# Altium PCB PCB2.PcbDoc
Units mm, origin at the board's own origin, x right, y up, seen from the top; angles counter-clockwise.
Board outline 91.95 x 88.52 mm, 2 copper layers (Top Layer, Bottom Layer); 12 components, 25 nets, 78 pads, 0 vias.
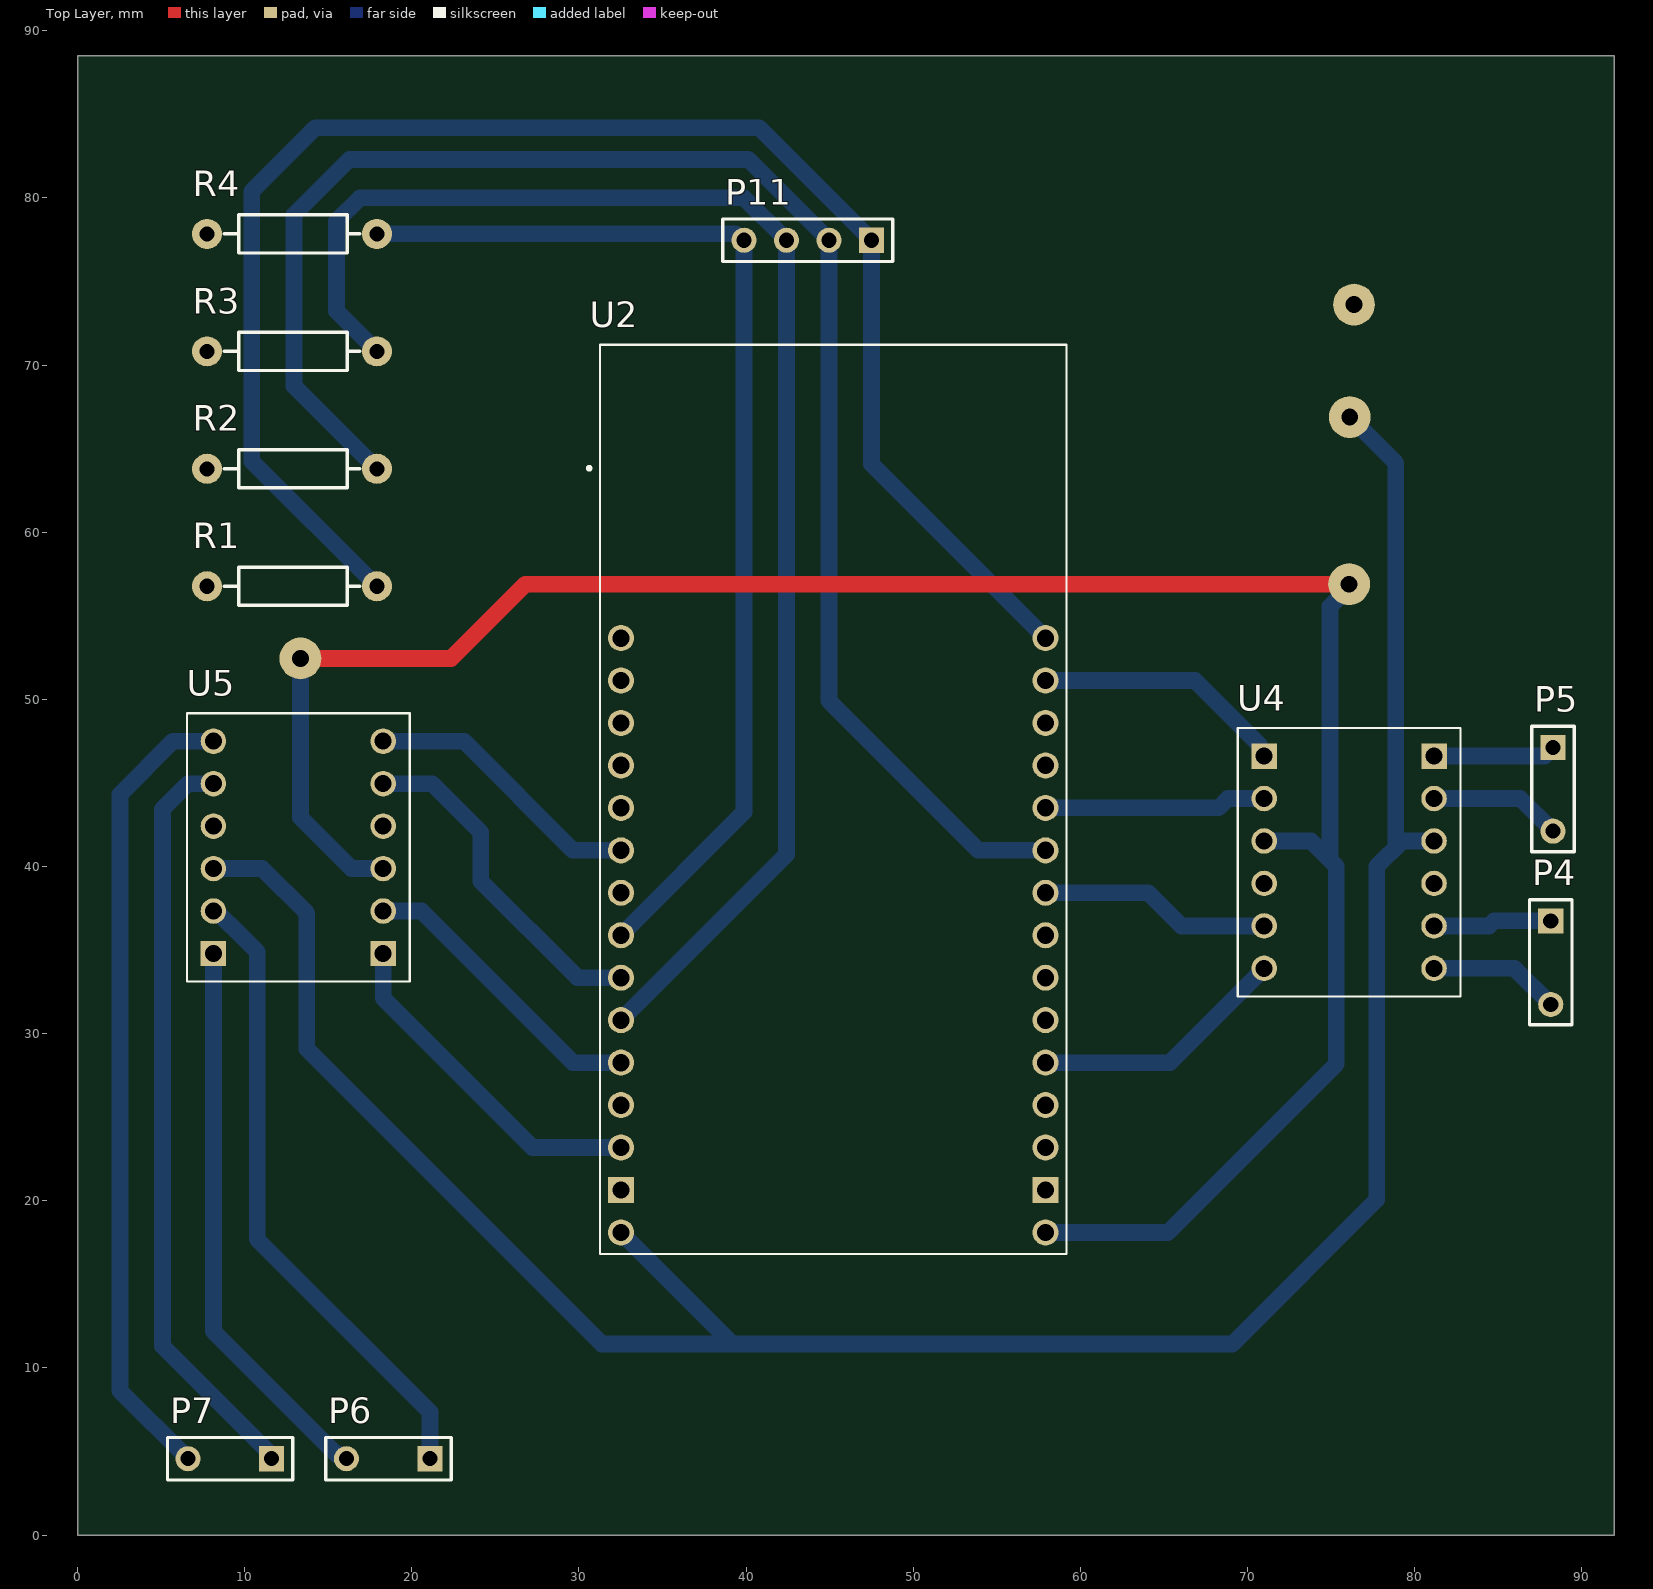
[diagram p0: Top Layer view]
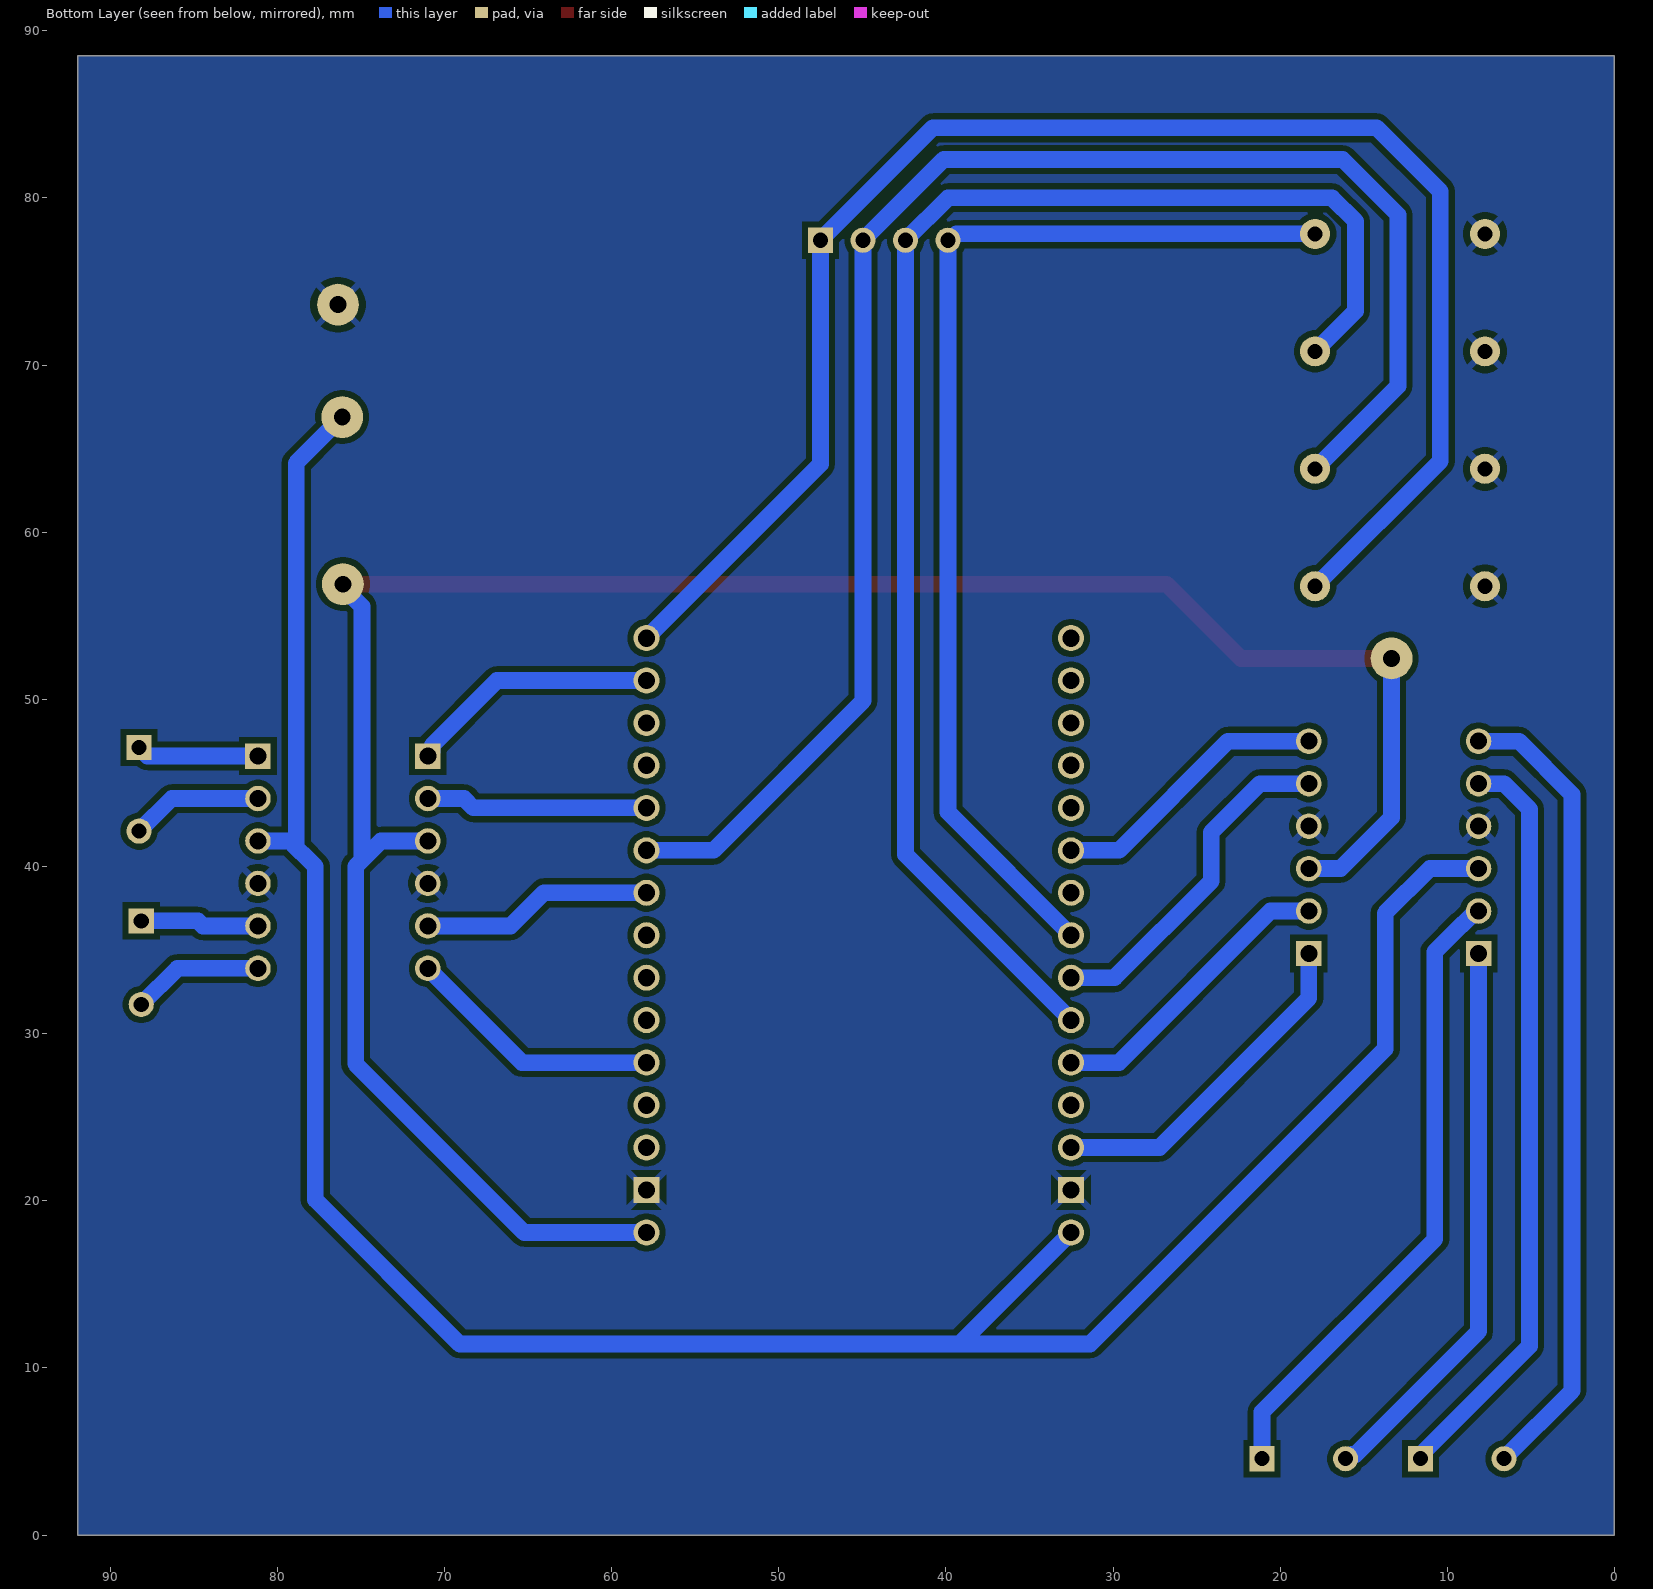
[diagram p1: Bottom Layer view, seen from below]
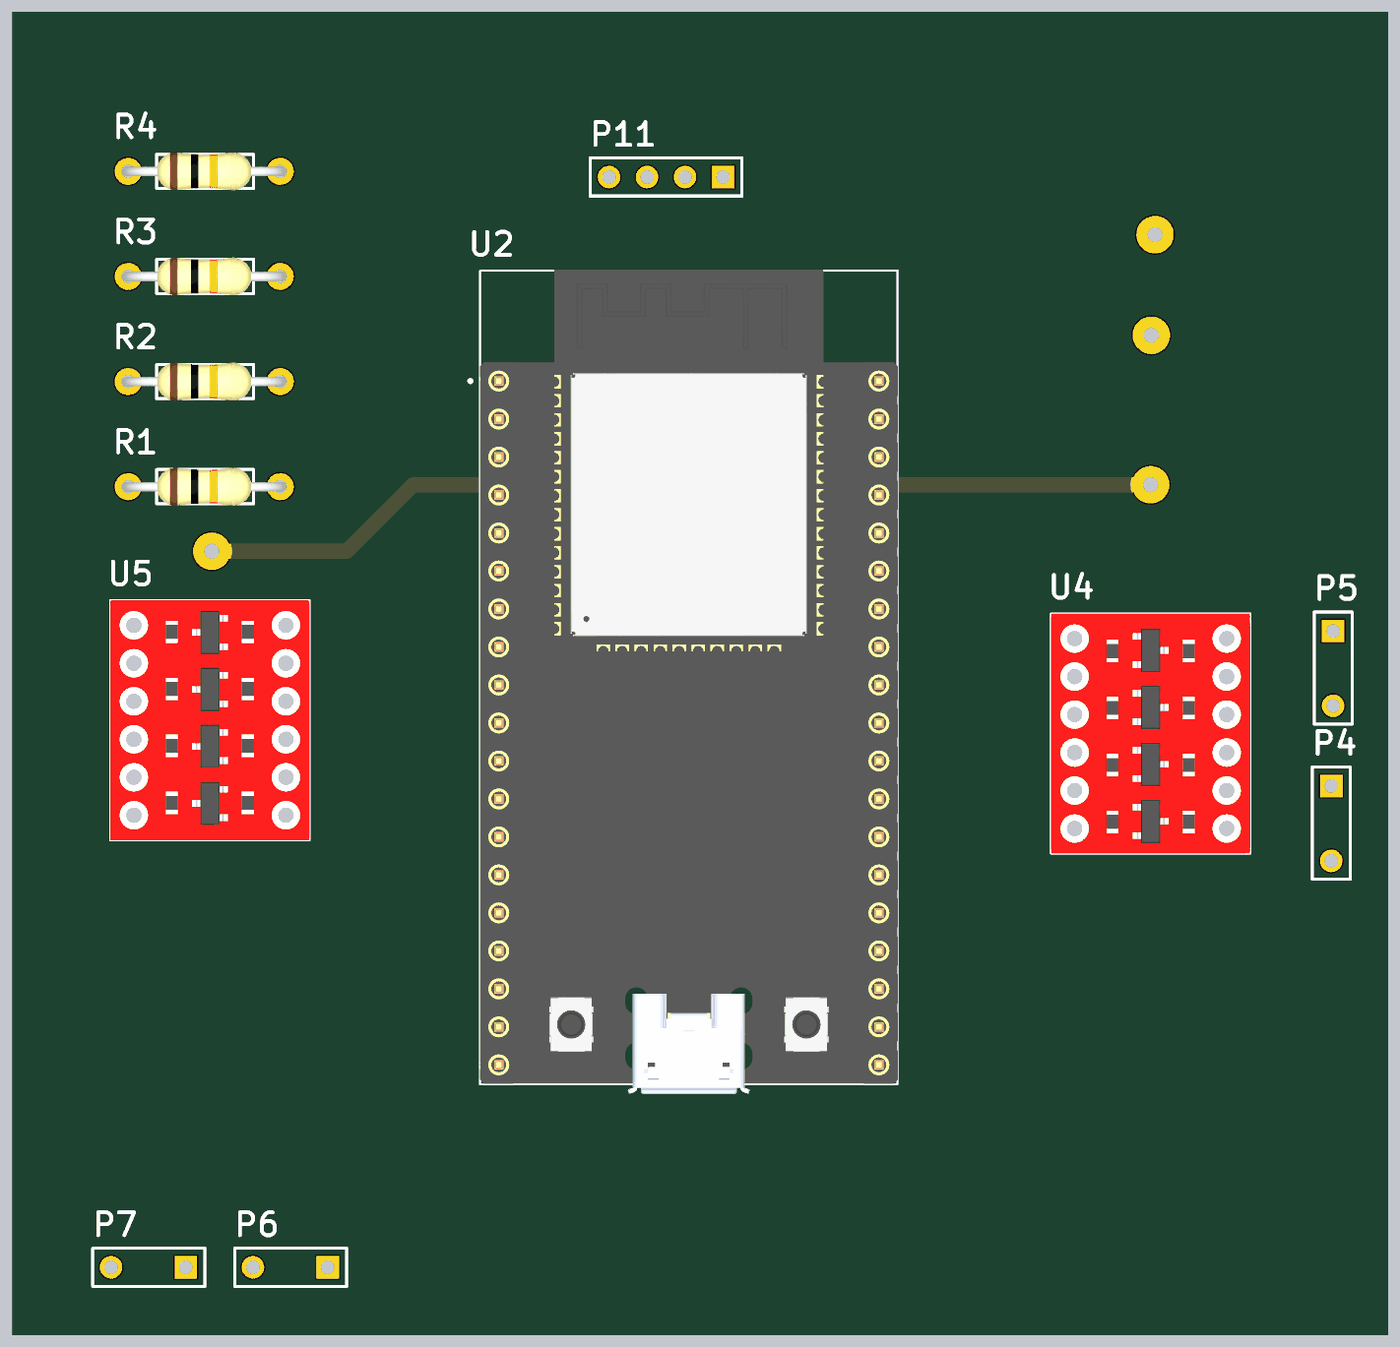
[diagram p2: 3D render of the assembled board from above, using the file's embedded part models]

## Layer stack, top to bottom
Top Solder: solder mask 0.0102, Solder Resist, Dk 3.5
Top Layer: signal copper 0.0356
Dielectric 1: dielectric 0.32, FR-4, Dk 4.8
Bottom Layer: signal copper 0.0356
Bottom Solder: solder mask 0.0102, Solder Resist, Dk 3.5

## Board outline
0,0 91.948,0 91.948,88.519 0,88.519

## Design rules (kind name [scope] priority, off if disabled: settings)
Clearance [All] p1: gap=0.35 ignorepadtopadclearanceinfootprint=FALSE except(0: Arc-Text Arc-Hole Track-Text Track-Hole SMDPad-Text SMDPad-Hole THPad-Text THPad-Hole Via-Text Via-Hole Fill-Text Fill-Hole Poly-Text Poly-Hole Region-Text Region-Hole Text-Text Text-Hole; 0.7: Arc-Arc Arc-Track Track-Track)
ComponentClearance [All] p1: gap=0.3 collisioncheckmode=3 verticalgap=0.254 showdistances=FALSE
HoleSize HoleSize_1 [All] p1: absolutevalues=TRUE maxlimit=1 minlimit=0.6 maxpercent=80.000 minpercent=20.000
HoleToHoleClearance [All] p1: gap=0.1 allowstackedmicrovias=TRUE
MinimumSolderMaskSliver [All] p1: minsoldermaskwidth=0.05
PolygonConnect [All] p1: connectstyle=Relief reliefconductorwidth=0.4 reliefentries=4 polygonreliefangle="90 Angle" airgapwidth=0.4
RoutingVias [All] p1: holewidth=0.9 width=2 viastyle="Through Hole" minholewidth=0.9 minwidth=2 maxholewidth=0.9 maxwidth=2
SilkToSilkClearance [All] p1: silktosilkclearance=0
SilkToSolderMaskClearance [IsPad] p1: minsilkscreentomaskgap=0 clearancetoexposedcopper=TRUE
SolderMaskExpansion [All] p1: expansion=0.102 istentingtop=FALSE
SupplyNets "Schematic Supply Nets_3" [InNet('VCC')] p1: voltage=0.000
SupplyNets "Schematic Supply Nets_2" [InNet('GND')] p2: voltage=0.000
SupplyNets "Schematic Supply Nets_1" [InNet('+3.3V')] p3: voltage=0.000
SupplyNets "Schematic Supply Nets" [InNet('+5V')] p4: voltage=0.000
Width [All] p1: maxlimit=1.2 minlimit=0.5 preferedwidth=1 minimp=50.000000 maximp=50.000000 favimp=50.000000
24 further rules are at their usual default settings.

## Components (designator, comment, footprint, x,y, rotation, side; value= is the part's Value field where it differs from the comment)
P4 "Header 1x2" KRE1X2 88.138,36.75 r270 top
P5 "Header 1x2" KRE1X2 88.265,47.117 r270 top
P6 "Header 1x2" KRE1X2 21.082,4.572 r180 top
P7 "Header 1x2" KRE1X2 11.604,4.572 r180 top
P11 "Header 1x4" HDR1X4 47.498,77.47 r180 top
R1 "4x10K" "RES 10K 1/4W CARBON FILM" 12.827,56.769 r0 top
R2 "RES 10K 1/4W CARBON FILM" "RES 10K 1/4W CARBON FILM" 12.827,63.796 r0 top
R3 "RES 10K 1/4W CARBON FILM" "RES 10K 1/4W CARBON FILM" 12.827,70.824 r0 top
R4 "RES 10K 1/4W CARBON FILM" "RES 10K 1/4W CARBON FILM" 12.827,77.851 r0 top
U2 "ESP32-DEVKITC-32D" "MODULE_ESP32-DEVKITC-32D - duplicate" 45.212,44.069 r0 top
U4 "Logic Level Shifter" CONV_BOB-12009 76.073,40.259 r0 top
U5 "Logic Level Shifter" CONV_BOB-12009 13.208,41.148 r180 top

## Footprints (in the part's own frame and the unit in brackets; to place one, negate y for a bottom-side part, rotate by r counter-clockwise, add the part's x,y. Pads: shape width x height; smd on the part's side, far side on the other; paste and mask are expansions set on the pad)
CONV_BOB-12009 [mil]
  round 60 hole 40: GND_1(200,-50) GND_2(-200,-50) HV(200,50) HV2(200,150) HV3(200,-150) HV4(200,-250) LV(-200,50) LV2(-200,150) LV3(-200,-150) LV4(-200,-250)
  rect 60x60 / inner round 60 / far side rect 60x60 hole 40: HV1(200,250) LV1(-200,250)
  silkscreen extent -262,-316 262,316, body extent -262,-316 262,316, height 110
HDR1X4 [mm]
  rect 1.5x1.5 hole 0.9: 1(0,0)
  round 1.5 hole 0.9: 2(2.54,0) 3(5.08,0) 4(7.62,0)
  silkscreen extent -1.27,-1.27 8.89,1.27
KRE1X2 [mm]
  rect 1.5x1.5 hole 0.9: 1(0,0)
  round 1.5 hole 0.9: 2(5,0)
  silkscreen extent -1.27,-1.27 6.22,1.27
"MODULE_ESP32-DEVKITC-32D - duplicate" [mm]
  round 1.56 hole 1.04: J2-5(-12.7,9.6) J2-6(-12.7,7.06) J2-7(-12.7,4.52) J2-8(-12.7,1.98) J2-9(-12.7,-0.56) J2-10(-12.7,-3.1) J2-11(-12.7,-5.64) J2-12(-12.7,-8.18) J2-13(-12.7,-10.72) J2-14(-12.7,-13.26) J2-15(-12.7,-15.8) J2-16(-12.7,-18.34) J2-17(-12.7,-20.88) J2-19(-12.7,-25.96) J3-5(12.7,9.6) J3-6(12.7,7.06) J3-7(12.7,4.52) J3-8(12.7,1.98) J3-9(12.7,-0.56) J3-10(12.7,-3.1) J3-11(12.7,-5.64) J3-12(12.7,-8.18) J3-13(12.7,-10.72) J3-14(12.7,-13.26) J3-15(12.7,-15.8) J3-16(12.7,-18.34) J3-17(12.7,-20.88) J3-19(12.7,-25.96)
  rect 1.56x1.56 hole 1.04: J2-18(-12.7,-23.42) J3-18(12.7,-23.42)
  silkscreen extent -14.7,-27.25 13.95,27.15, body extent -13.97,-27.9 13.97,27.2, height 6.69
"RES 10K 1/4W CARBON FILM" [mm]
  round 1.8 hole 0.9: 1(-5.08,0) 2(5.08,0)
  silkscreen extent -4.06,-1.14 4.06,1.14, body extent -5.47,-1.27 5.47,1.27, height 3.27

## Part data
P4 P5 P6 P7: Manufacturer=Cromax, Manufacturer Part Number=IMP10327, Supplier Part Number 1="Barra de Pinos Simples 1x40 Macho BMO40-1E", Accessory Type=-, Brand=Cromax, Category="Headers & Wire Housings", ComponentLink1Description=http://loja.multcomercial.com.br/barra-de-pinos-simples-1x40-macho-bmo40-1e.html, ComponentLink1URL=http://loja.multcomercial.com.br/barra-de-pinos-simples-1x40-macho-bmo40-1e.html, Contact Gender="Pin (Male)", Contact Plating=Gold, Contact Type=-, Minimum Order Quantity=1, Mounting Angle=Vertical, Mounting Style="Straight Pin", Number of Positions="40 Position", Number of Rows="1 Row", Pitch="2 mm", Pricing 1="1=1.00, 5=0.20 (BRL)", Product=Headers, Product Category=Accessories, Reeling=False, RoHS="RoHS Compliant", RoHS - Mouser=Y, Row Spacing=-, Stock 1=14, Supplier 1="Mult Comercial", Termination Style="Through Hole", Type=Breakaway
P11: "Headers & Wire Housings 40Pin 2mm Spacing Single Row Hdrs, 5pc", Manufacturer=Cromax, Manufacturer Part Number=IMP10327, Supplier Part Number 1="Barra de Pinos Simples 1x40 Macho BMO40-1E", Accessory Type=-, Brand=Cromax, Category="Headers & Wire Housings", ComponentLink1Description=http://loja.multcomercial.com.br/barra-de-pinos-simples-1x40-macho-bmo40-1e.html, ComponentLink1URL=http://loja.multcomercial.com.br/barra-de-pinos-simples-1x40-macho-bmo40-1e.html, Contact Gender="Pin (Male)", Contact Plating=Gold, Contact Type=-, Minimum Order Quantity=1, Mounting Angle=Vertical, Mounting Style="Straight Pin", Number of Positions="40 Position", Number of Rows="1 Row", Pitch="2 mm", Pricing 1="1=1.00, 5=0.20 (BRL)", Product=Headers, Product Category=Accessories, Reeling=False, RoHS="RoHS Compliant", RoHS - Mouser=Y, Row Spacing=-, Stock 1=14, Supplier 1="Mult Comercial", Termination Style="Through Hole", Type=Breakaway
R1: library part "RES 10K 1/4W CARBON FILM", "RES 10K OHM 1/4W 5% CARBON FILM", Manufacturer=Ty-Ohm, Manufacturer Part Number=CR25, Operating Temperature="-55°C ~ 155°C", Package / Case=Axial, Power (Watts)="0.25W, 1/4W", Resistance (Ohms)=?, Supplier Part Number 1="Resistor de Filme de Carbono 1/4 de Watt CR25 5% de tolerância - 0.22R Ω à 10M Ω", Temperature Coefficient="0/ -500ppm/°C", Tolerance=±5%, Category=Resistors, ComponentLink1Description=http://loja.multcomercial.com.br/resistor-de-1-4-de-watt-cr25-5-de-tolerancia.html, ComponentLink1URL=http://loja.multcomercial.com.br/resistor-de-1-4-de-watt-cr25-5-de-tolerancia.html, Composition="Carbon Film", Features="Flame Retardant Coating, Safety", Height=-, Number of Terminations=2, Packaging="Cut Tape (CT)", Pricing 1="1=0.20 (BRL)", RoHS="RoHS Compliant", Size / Dimension="0.091\" Dia x 0.256\" L (2.30mm x 6.50mm)", Stock 1=617543, Supplier 1="Mult Comercial", Supplier Device Package=Axial
R2 R3 R4: "RES 10K OHM 1/4W 5% CARBON FILM", Manufacturer=Ty-Ohm, Manufacturer Part Number=CR25, Operating Temperature="-55°C ~ 155°C", Package / Case=Axial, Power (Watts)="0.25W, 1/4W", Resistance (Ohms)=?, Supplier Part Number 1="Resistor de Filme de Carbono 1/4 de Watt CR25 5% de tolerância - 0.22R Ω à 10M Ω", Temperature Coefficient="0/ -500ppm/°C", Tolerance=±5%, Category=Resistors, ComponentLink1Description=http://loja.multcomercial.com.br/resistor-de-1-4-de-watt-cr25-5-de-tolerancia.html, ComponentLink1URL=http://loja.multcomercial.com.br/resistor-de-1-4-de-watt-cr25-5-de-tolerancia.html, Composition="Carbon Film", Features="Flame Retardant Coating, Safety", Height=-, Number of Terminations=2, Packaging="Cut Tape (CT)", Pricing 1="1=0.20 (BRL)", RoHS="RoHS Compliant", Size / Dimension="0.091\" Dia x 0.256\" L (2.30mm x 6.50mm)", Stock 1=617543, Supplier 1="Mult Comercial", Supplier Device Package=Axial
U2: "WiFi Development Tools (802.11) ESP32 General Development Kit, ESP32-WROOM-32D on the board", Package=None, Check_prices=https://www.snapeda.com/parts/ESP32-DEVKITC-32D/Espressif+Systems/view-part/?ref=eda, MF="Espressif Systems", MP=ESP32-DEVKITC-32D, SnapEDA_Link=https://www.snapeda.com/parts/ESP32-DEVKITC-32D/Espressif+Systems/view-part/?ref=snap
U4 U5: "BSS138 - Logic-Level Translator Interface Evaluation Board", Package=None, Check_prices=https://www.snapeda.com/parts/BOB-12009/SparkFun/view-part/?ref=eda, MF=SparkFun, MP=BOB-12009, SnapEDA_Link=https://www.snapeda.com/parts/BOB-12009/SparkFun/view-part/?ref=snap

## Free pads (board coordinates)
  round 2.5 hole 1: 2(13.335,52.451) 2(76.073,56.896) 2(76.114,66.889) 2(76.368,73.62)

## Nets (pads, with @x,y where several pads share a name; then routed paths per layer and width w, separated by ;. In a path a pad name is that pad's centre, name@x,y a point inside that pad or via, vN(x,y) a via of type N, cw(c..) or ccw(c..) an arc to the next point about the centre after c; other vN are vias at no path point)
+3.3V: pad.2@13.335,52.451 pad.2@76.073,56.896 U2.J3-19 U4.LV U5.LV | length 135.6
  Top Layer w1: pad.2@13.335,52.451 22.352,52.451 26.797,56.896 pad.2@76.073,56.896
  Bottom Layer w1: pad.2@13.335,52.451 13.335,42.926 16.383,39.878 U5.LV ; U2.J3-19 65.226,18.109 75.311,28.194 75.311,40.005 74.93,40.386 ; U4.LV 73.787,41.529 74.93,40.386 ; pad.2@76.073,56.896 76.073,56.703 74.93,55.56 74.93,40.386
+5V: pad.2@76.114,66.889 U2.J2-19 U4.HV U5.HV | length 150
  Bottom Layer w1: U5.HV 11.049,39.878 13.716,37.211 13.716,29.083 31.369,11.43 39.191,11.43 ; U2.J2-19 39.191,11.43 ; pad.2@76.114,66.889 78.867,64.135 78.867,41.529 78.867,41.148 ; U4.HV 79.248,41.529 78.867,41.148 ; 39.191,11.43 69.088,11.43 77.724,20.066 77.724,40.005 78.173,40.454 78.867,41.148
D1_B: P6.2 U5.HV1 | length 33.7
  Bottom Layer w1: U5.HV1 8.128,12.192 15.498,4.822 15.697,4.822 15.947,4.572 P6.2
D1_Backward: U2.J2-15 U5.LV2 | length 18
  Bottom Layer w1: U5.LV2 20.574,37.338 29.643,28.269 U2.J2-15
D1_F: P6.1 U5.HV2 | length 38.2
  Bottom Layer w1: U5.HV2 8.27,37.338 9.077,36.531 9.121,36.531 10.746,34.906 10.746,17.702 21.082,7.366 P6.1
D1_Forward: U2.J2-17 U5.LV1 | length 20.6
  Bottom Layer w1: U5.LV1 18.288,32.122 27.221,23.189 U2.J2-17
D2_B: P7.2 U5.HV4 | length 48.3
  Bottom Layer w1: P7.2 2.54,8.636 2.54,44.323 5.715,47.498 U5.HV4
D2_Backward: U2.J2-10 U5.LV4 | length 16.9
  Bottom Layer w1: U5.LV4 23.114,47.498 29.643,40.969 U2.J2-10
D2_F: P7.1 U5.HV3 | length 45.2
  Bottom Layer w1: U5.HV3 6.604,44.958 5.08,43.434 5.08,11.303 11.354,5.029 11.354,4.822 P7.1
D2_Forward: U2.J2-13 U5.LV3 | length 20.7
  Bottom Layer w1: U5.LV3 21.209,44.958 24.13,42.037 24.13,39.116 29.897,33.349 U2.J2-13
GND: pad.2@76.368,73.62 R1.1 R2.1 R3.1 R4.1 U2.J2-18 U2.J3-18 U4.GND_1 U4.GND_2 U5.GND_1 U5.GND_2
LB: P4.2 U4.HV4 | length 7.9
  Bottom Layer w1: U4.HV4 85.979,33.909 P4.2
Left_Backward: U2.J3-11 U4.LV3 | length 13.9
  Bottom Layer w1: U2.J3-11 64.06,38.429 66.04,36.449 U4.LV3
Left_Forward: U2.J3-15 U4.LV4 | length 15.4
  Bottom Layer w1: U2.J3-15 65.353,28.269 U4.LV4
LF: P4.1 U4.HV3 | length 7.1
  Bottom Layer w1: U4.HV3 84.441,36.449 84.742,36.75 P4.1
PB11: P11.1 R1.2 U2.J3-5 | length 96.3
  Bottom Layer w1: R1.2 10.414,64.262 10.414,80.391 14.224,84.201 40.767,84.201 P11.1 47.498,64.083 U2.J3-5
PB12: P11.2 R2.2 U2.J3-10 | length 96.8
  Bottom Layer w1: R2.2 12.954,68.749 12.954,78.994 16.256,82.296 40.132,82.296 P11.2 44.958,49.911 53.9,40.969 U2.J3-10
PB21: P11.3 R3.2 U2.J2-14 | length 88.1
  Bottom Layer w1: R3.2 15.494,73.237 15.494,78.613 16.891,80.01 39.878,80.01 P11.3 42.418,40.715 U2.J2-14
PB22: P11.4 R4.2 U2.J2-12 | length 66.8
  Bottom Layer w1: R4.2 39.362,77.851 39.743,77.47 P11.4 39.878,43.255 U2.J2-12
RB: P5.2 U4.HV2 | length 7.9
  Bottom Layer w1: U4.HV2 86.313,44.069 P5.2
RF: P5.1 U4.HV1 | length 7.3
  Bottom Layer w1: U4.HV1 87.757,46.609 P5.1
RGB: U2.J3-12
Right_Backward: U2.J3-6 U4.LV1 | length 15.2
  Bottom Layer w1: U2.J3-6 66.854,51.129 70.731,47.252 70.731,46.871 U4.LV1
Right_Forward: U2.J3-9 U4.LV2 | length 13.3
  Bottom Layer w1: U2.J3-9 68.274,43.509 68.834,44.069 U4.LV2
VCC: 
pads on no net: U2.J2-5 U2.J2-6 U2.J2-7 U2.J2-8 U2.J2-9 U2.J2-11 U2.J2-16 U2.J3-7 U2.J3-8 U2.J3-13 U2.J3-14 U2.J3-16 U2.J3-17

## Polygon pours and split planes (outlines as drawn)
GND on Bottom Layer "NONET_L-01_P-001" (solid, pour order 0): 0,88.519 91.948,88.519 91.948,0 0,0

## Text inside footprints (layer, text, board x,y; h text height)
R1: Mechanical 29 "1" at 8.89,55.753 h0.5
R2: Mechanical 29 "1" at 8.89,62.78 h0.5
R3: Mechanical 29 "1" at 8.89,69.808 h0.5
R4: Mechanical 29 "1" at 8.89,76.835 h0.5